# EAGLE board firefly2 (EAGLE 5.10)
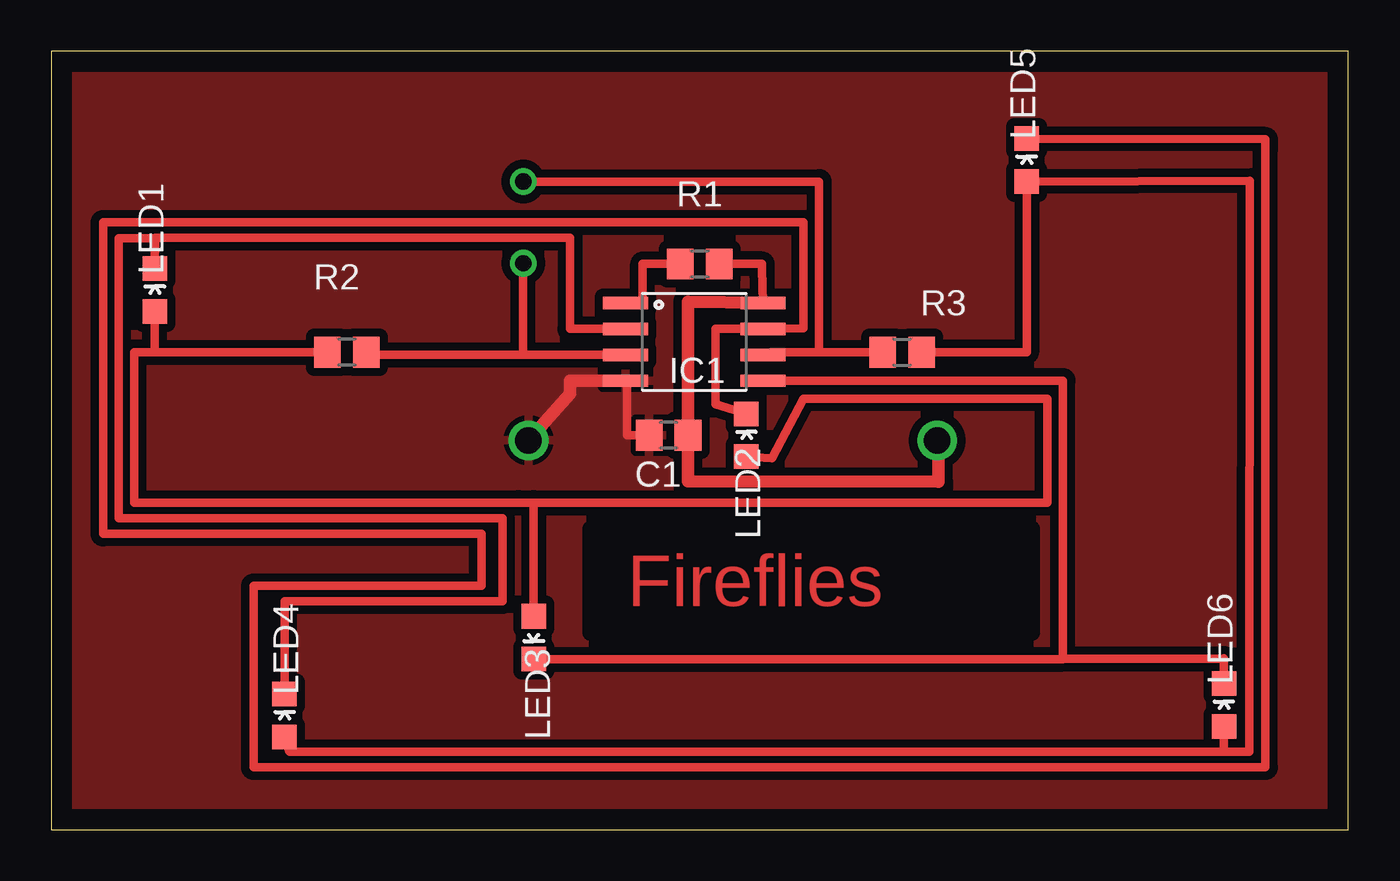
[diagram p0: board, top side]
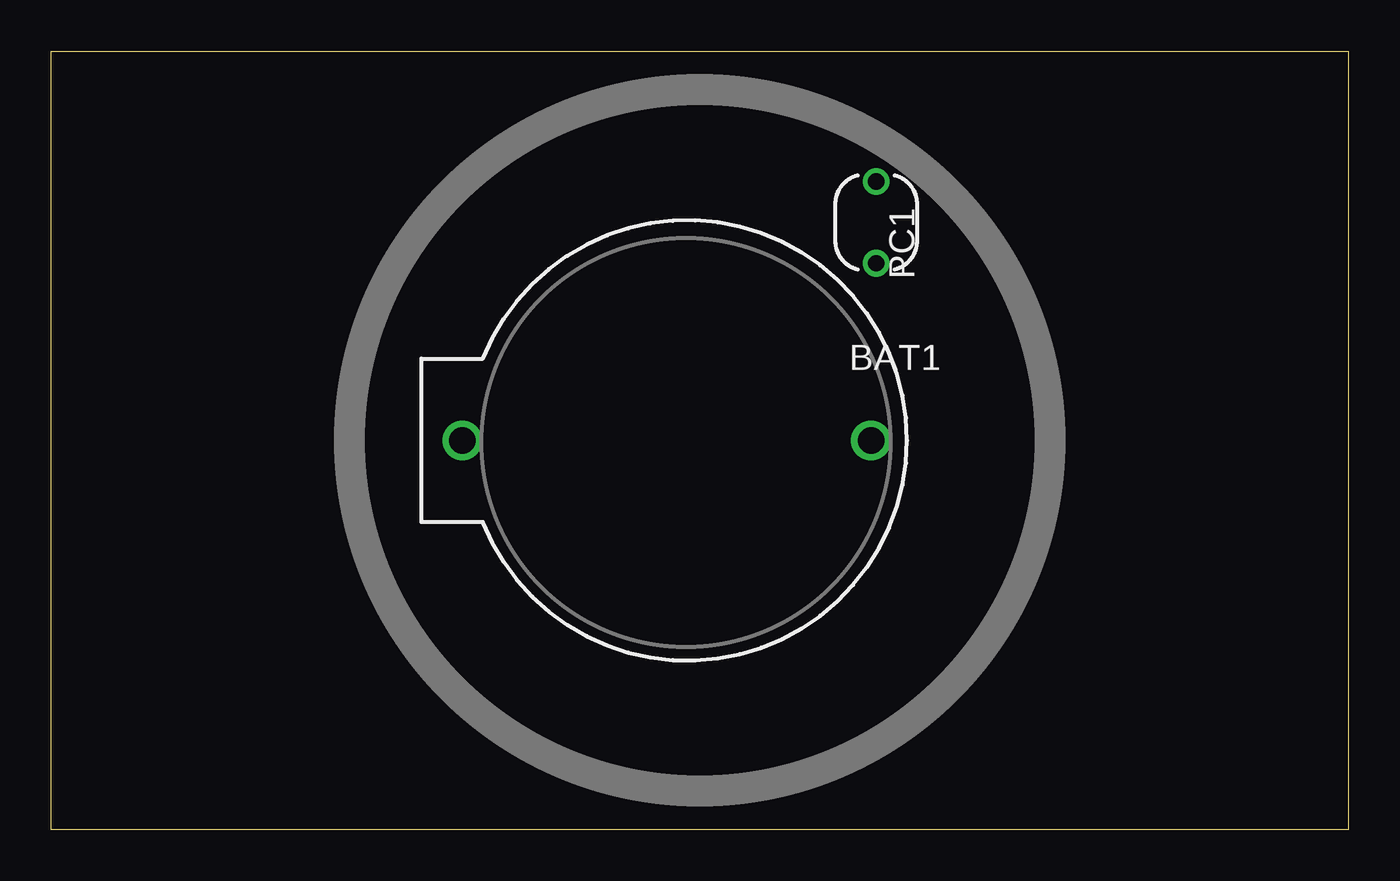
[diagram p1: board, bottom side, seen from below]

Size 63.5 x 38.1 mm. Coordinates in mm from the lower left corner, seen from the top.
Outline: 0,0 63.5,0 63.5,38.1 0,38.1 0,0
Copper layers (1*16): Top 0.035mm / dielectric 1.5mm / Bottom 0.035mm
Design rules "default": minimum track width 10mil, minimum drill 0.6mm, track to track 8mil, track to pad 8mil, pad to pad 8mil, via to via 8mil, smd to smd 8mil, copper to edge 40mil, drill to drill 8mil, minimum pad ring 10mil, minimum via ring 8mil, stop-mask expansion 4mil, vias tented up to drill 0mil, thermal gap 10mil
tRestrict: area 26.4,9.7 to 48,14.7

## Footprints (pad centres in the part's own frame; a part is rotated, then mirrored left to right if it is on the bottom)
BATTCOM_20MM_PTH = drill 1.295 round: 1 20,0; 2 0,0
R0805 = smd 1.3 x 1.5: 1 -0.95,0; 2 0.95,0
SO08-EIAJ = smd 0.61 x 2.21: 1 -1.905,-3.378; 2 -0.635,-3.378; 3 0.635,-3.378; 4 1.905,-3.378; 5 1.905,3.353; 6 0.635,3.353; 7 -0.635,3.353; 8 -1.905,3.353
LED-0805 = smd 1.2 x 1.2: A 0,-1.05; C 0,1.05
PHOTOCELL = drill 0.8 round: 1 -2,0; 2 2,0

## Placement (x,y rotation side)
BAT1  [BATTCOM_20MM_PTH]  23.37,19.05 180 bottom
C1  100n  [R0805]  30.23,19.3 180 top
IC1  ATTINY45  [SO08-EIAJ]  31.5,23.88 270 top
LED1  [LED-0805]  5.08,26.42 0 top
LED2  [LED-0805]  34.04,19.3 0 top
LED3  [LED-0805]  23.62,9.4 180 top
LED4  [LED-0805]  11.43,5.59 0 top
LED5  [LED-0805]  47.75,32.77 0 top
LED6  [LED-0805]  57.4,6.1 0 top
PC1  CDS  [PHOTOCELL]  23.11,29.72 270 bottom
R1  100K  [R0805]  31.75,27.69 0 top
R2  100  [R0805]  14.48,23.37 180 top
R3  100  [R0805]  41.66,23.37 0 top

## Library data of the parts
BAT1 C1 IC1 LED1-LED6 PC1 R1-R3 = firefly

## Nets
GND: BAT1.2 C1.2 IC1.4
N$1: IC1.1 R1.1
N$4: IC1.6 PC1.1 R3.1
N$5: LED1.A LED2.A LED3.A R2.2
N$6: LED4.A LED5.A LED6.A R3.2
N$7: IC1.2 LED1.C LED4.C
N$8: IC1.7 LED2.C LED5.C
N$9: IC1.5 LED3.C LED6.C
N$10: IC1.3 PC1.2 R2.1
VBATT: BAT1.1 C1.1 IC1.8 R1.2

## Tracks (layer width: path | path; a pad name or v marks a point on that pad's centre or on a via)
GND
  Top 0.406: C1.2 28.19,19.3 28.19,21.97 IC1.4
  Top 0.61: BAT1.2 25.4,21.34 25.4,21.97 IC1.4
  pour Top (isolate 0.406): 0,38.1 63.5,38.1 63.5,22.35 63.5,0 0,0
N$1
  Top 0.406: IC1.1 28.89,25.78 28.96,25.78 28.96,27.69 R1.1
N$4
  Top 0.406: 37.59,23.37 35.23,23.37 IC1.6 | 37.59,23.37 R3.1 | PC1.1 37.59,31.72 37.59,23.37
N$5
  Top 0.406: 5.08,23.37 LED1.A | LED2.A 35.28,18.19 36.83,21.08 48.77,21.08 48.77,16 23.62,16 | 23.62,16 22.86,16 4.06,16 4.06,23.37 5.08,23.37 | 23.62,16 LED3.A | 5.08,23.37 R2.2
N$6
  Top 0.406: 57.4,3.81 58.65,3.81 58.67,31.75 LED5.A 47.75,23.37 R3.2 | 57.4,3.81 LED6.A 57.4,3.81 | LED4.A 11.68,3.81 57.4,3.81
N$7
  Top 0.406: IC1.2 26.04,24.51 25.4,24.51 25.4,28.96 10.41,28.96 5.09,28.96 LED1.C 5.08,28.7 5.08,28.94 3.3,28.94 3.3,15.24 22.1,15.24 22.1,11.18 11.43,11.18 LED4.C
N$8
  Top 0.406: LED5.C 59.44,33.78 59.44,33.27 59.44,3.05 9.91,3.05 9.91,8.13 9.91,11.94 21.08,11.94 21.08,14.48 2.54,14.48 2.54,29.72 36.83,29.72 36.83,24.54 IC1.7 32.51,24.51 32.51,20.83 LED2.C
N$9
  Top 0.406: 49.53,8.37 57.4,8.37 57.4,8.38 LED6.C | IC1.5 49.53,21.97 49.53,8.37 | LED3.C 49.53,8.35 49.53,8.37
N$10
  Top 0.406: 23.11,23.24 15.55,23.24 R2.1 | 23.11,23.24 IC1.3 | 23.11,23.24 23.11,27.18 | 23.11,27.18 23.11,27.69 | 23.11,27.18 PC1.2
VBATT
  Top 0.406: IC1.8 34.8,27.43 34.8,27.69 33.2,27.69 R1.2 33.02,28.01 | 43.43,19.05 BAT1.1 43.43,19.05
  Top 0.61: 43.43,19.05 43.43,17.02 31.17,17.04 C1.1 31.17,25.83 IC1.8

## Text on the board
Top: Fireflies